# EAGLE board 13371_9DoF_Sensor_Stick_panel_v21 (EAGLE 7.5.0), part 1 of 9
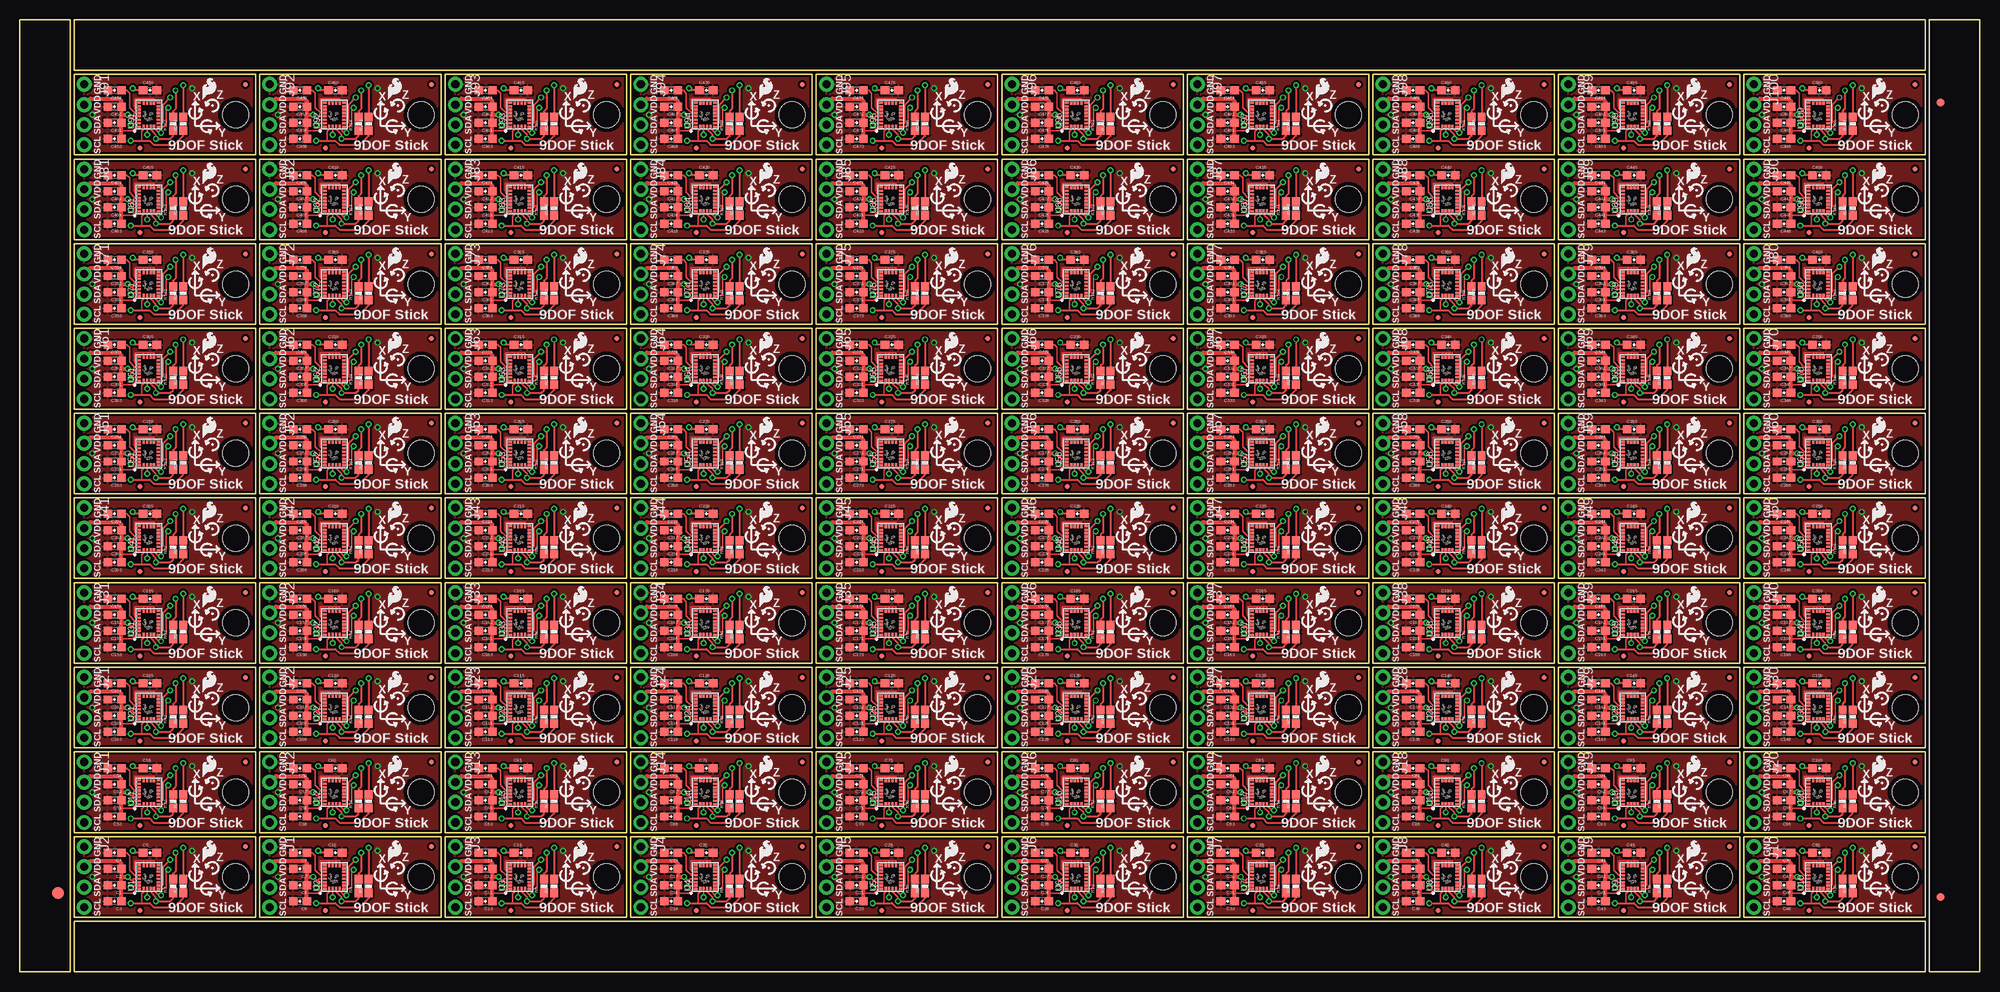
[diagram p0: board, top side]
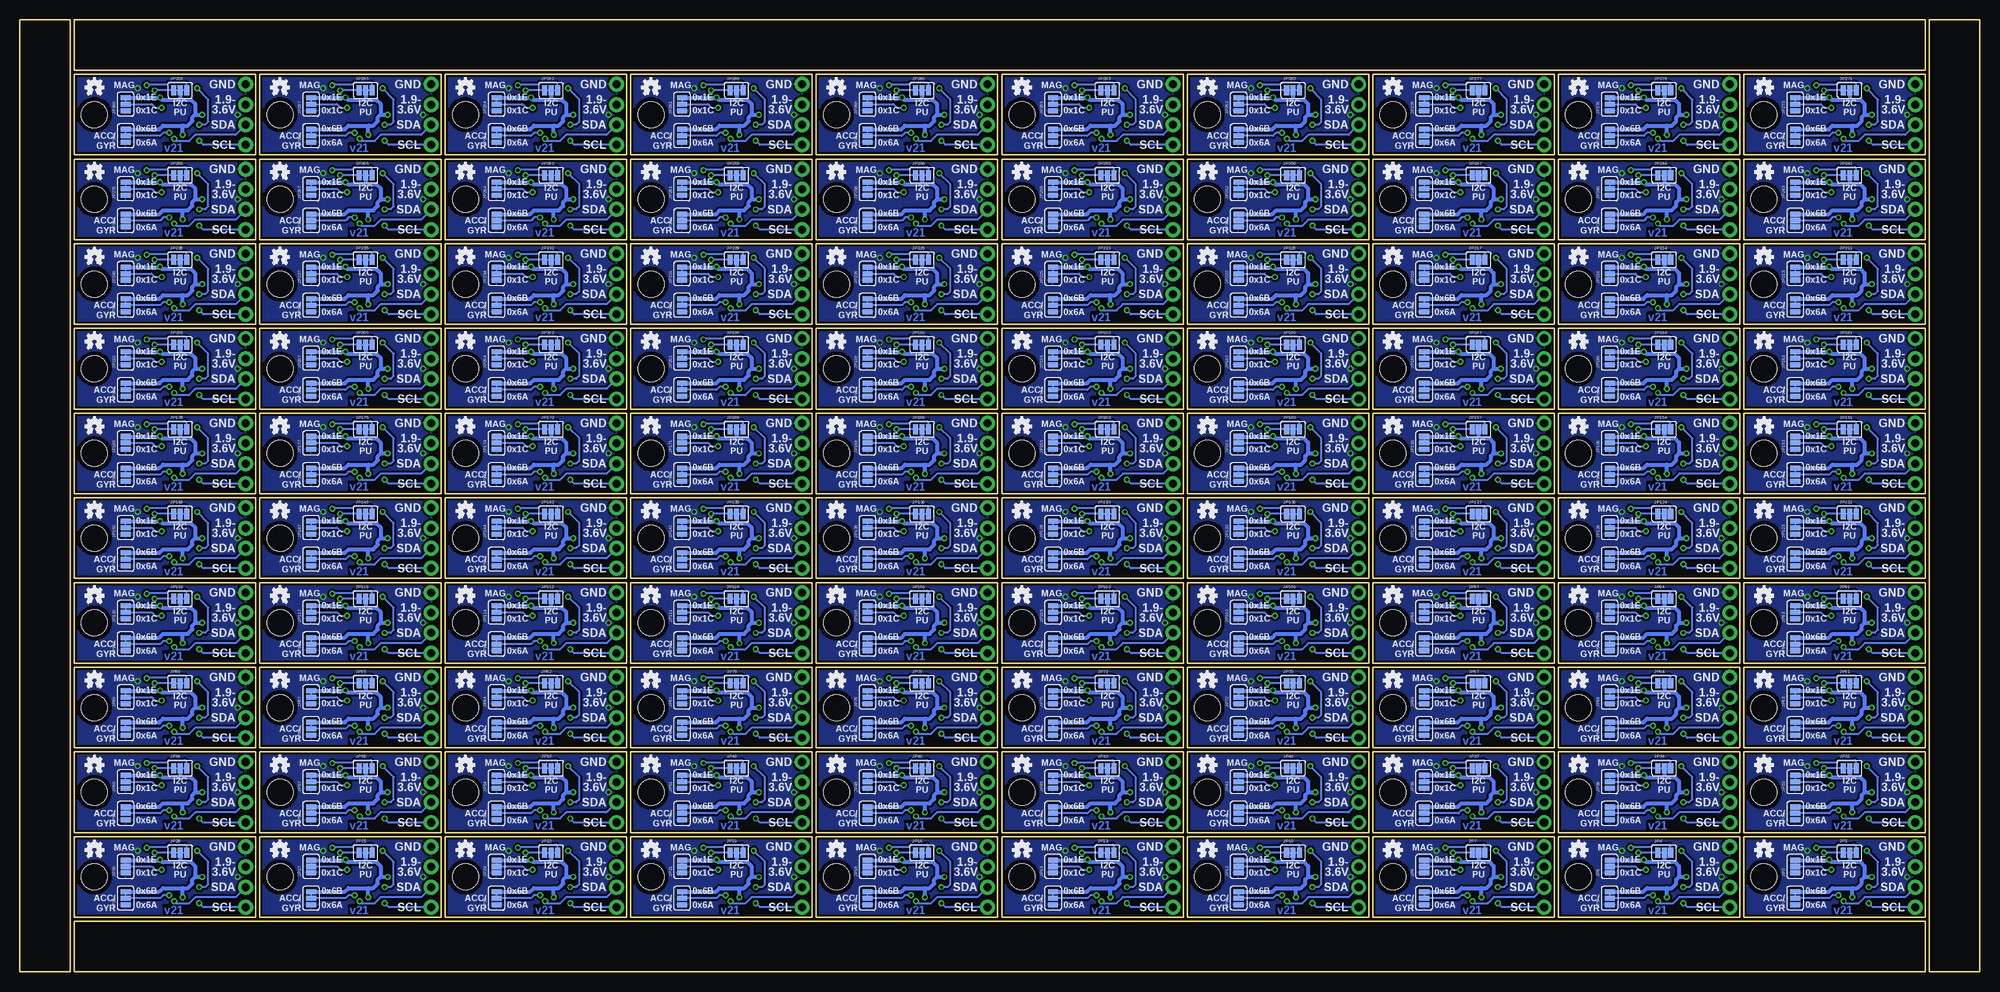
[diagram p1: board, bottom side, seen from below]

Size 246.89 x 119.89 mm. Coordinates in mm from the lower left corner, seen from the top.
Outline: 424 segments
Copper layers (1*16): Top 0.035mm / dielectric 1.5mm / Bottom 0.035mm
Design rules "SparkFun-2-layer-TIGHT": minimum track width 7mil, minimum drill 15mil, track to track 7mil, track to pad 7mil, pad to pad 7mil, via to via 7mil, smd to smd 7mil, copper to edge 7mil, drill to drill 7mil, minimum pad ring 7mil, minimum via ring 7mil, stop-mask expansion 4mil, vias tented up to drill 25mil, thermal gap 10mil

## Footprints (pad centres in the part's own frame; a part is rotated, then mirrored left to right if it is on the bottom)
0603-CAP = smd 1.1 x 1: 1 -0.85,0; 2 0.85,0
FIDUCIAL-1.5X3 = smd 1.5 x 1.5: 1 0,0
FIDUCIAL-1X2 = smd 1 x 1: 1 0,0
MICRO-FIDUCIAL = smd 0.635 x 0.635: 1 0,0
STAND-OFF = hole 3.302: 0,0
1X04_NO_SILK_ALL_ROUND = drill 1.016 pad 1.88: 1 0,0; 2 2.54,0; 3 5.08,0; 4 7.62,0
PAD-JUMPER-3-3OF3_NC_BY_TRACE_YES_SILK_FULL_BOX = smd 0.635 x 1.27: 1 -0.813,0; 2 0,0; 3 0.813,0
PAD-JUMPER-3-2OF3_NC_BY_TRACE_YES_SILK_FULL_BOX = smd 0.635 x 1.27: 1 -0.813,0; 2 0,0; 3 0.813,0
0603-RES = smd 1.1 x 1: 1 -0.85,0; 2 0.85,0
LGA24-8X4 = smd 0.27 x 0.45: 1 -1.505,1.225; 6 -1.505,-1.225; 7 -1.075,-1.225; 8 -0.645,-1.225; 9 -0.215,-1.225; 10 0.215,-1.225; 11 0.645,-1.225; 12 1.075,-1.225; 13 1.505,-1.225; 18 1.505,1.225; 19 1.075,1.225; 20 0.645,1.225; 21 0.215,1.225; 22 -0.215,1.225; 23 -0.645,1.225; 24 -1.075,1.225 | smd 0.45 x 0.27: 2 -1.475,0.645; 3 -1.475,0.215; 4 -1.475,-0.215; 5 -1.475,-0.645; 14 1.475,-0.645; 15 1.475,-0.215; 16 1.475,0.215; 17 1.475,0.645

## Placement (x,y rotation side)
C1  10uF  [0603-CAP]  11.94,10.92 180 top
C2  0.1uF  [0603-CAP]  11.94,12.95 180 top
C3  0.1uF  [0603-CAP]  11.94,8.89 180 top
C4  10nF  [0603-CAP]  11.94,14.99 180 top
C5  0.1uF  [0603-CAP]  16.38,14.99 0 top
C6  10uF  [0603-CAP]  35.31,10.92 180 top
C7  0.1uF  [0603-CAP]  35.31,12.95 180 top
C8  0.1uF  [0603-CAP]  35.31,8.89 180 top
C9  10nF  [0603-CAP]  35.31,14.99 180 top
C10  0.1uF  [0603-CAP]  39.75,14.99 0 top
C11  10uF  [0603-CAP]  58.67,10.92 180 top
C12  0.1uF  [0603-CAP]  58.67,12.95 180 top
C13  0.1uF  [0603-CAP]  58.67,8.89 180 top
C14  10nF  [0603-CAP]  58.67,14.99 180 top
C15  0.1uF  [0603-CAP]  63.12,14.99 0 top
C16  10uF  [0603-CAP]  82.04,10.92 180 top
C17  0.1uF  [0603-CAP]  82.04,12.95 180 top
C18  0.1uF  [0603-CAP]  82.04,8.89 180 top
C19  10nF  [0603-CAP]  82.04,14.99 180 top
C20  0.1uF  [0603-CAP]  86.49,14.99 0 top
C21  10uF  [0603-CAP]  105.41,10.92 180 top
C22  0.1uF  [0603-CAP]  105.41,12.95 180 top
C23  0.1uF  [0603-CAP]  105.41,8.89 180 top
C24  10nF  [0603-CAP]  105.41,14.99 180 top
C25  0.1uF  [0603-CAP]  109.86,14.99 0 top
C26  10uF  [0603-CAP]  128.78,10.92 180 top
C27  0.1uF  [0603-CAP]  128.78,12.95 180 top
C28  0.1uF  [0603-CAP]  128.78,8.89 180 top
C29  10nF  [0603-CAP]  128.78,14.99 180 top
C30  0.1uF  [0603-CAP]  133.22,14.99 0 top
C31  10uF  [0603-CAP]  152.15,10.92 180 top
C32  0.1uF  [0603-CAP]  152.15,12.95 180 top
C33  0.1uF  [0603-CAP]  152.15,8.89 180 top
C34  10nF  [0603-CAP]  152.15,14.99 180 top
C35  0.1uF  [0603-CAP]  156.59,14.99 0 top
C36  10uF  [0603-CAP]  175.51,10.92 180 top
C37  0.1uF  [0603-CAP]  175.51,12.95 180 top
C38  0.1uF  [0603-CAP]  175.51,8.89 180 top
C39  10nF  [0603-CAP]  175.51,14.99 180 top
C40  0.1uF  [0603-CAP]  179.96,14.99 0 top
C41  10uF  [0603-CAP]  198.88,10.92 180 top
C42  0.1uF  [0603-CAP]  198.88,12.95 180 top
C43  0.1uF  [0603-CAP]  198.88,8.89 180 top
C44  10nF  [0603-CAP]  198.88,14.99 180 top
C45  0.1uF  [0603-CAP]  203.33,14.99 0 top
C46  10uF  [0603-CAP]  222.25,10.92 180 top
C47  0.1uF  [0603-CAP]  222.25,12.95 180 top
C48  0.1uF  [0603-CAP]  222.25,8.89 180 top
C49  10nF  [0603-CAP]  222.25,14.99 180 top
C50  0.1uF  [0603-CAP]  226.69,14.99 0 top
C51  10uF  [0603-CAP]  11.94,21.59 180 top
C52  0.1uF  [0603-CAP]  11.94,23.62 180 top
C53  0.1uF  [0603-CAP]  11.94,19.56 180 top
C54  10nF  [0603-CAP]  11.94,25.65 180 top
C55  0.1uF  [0603-CAP]  16.38,25.65 0 top
C56  10uF  [0603-CAP]  35.31,21.59 180 top
C57  0.1uF  [0603-CAP]  35.31,23.62 180 top
C58  0.1uF  [0603-CAP]  35.31,19.56 180 top
C59  10nF  [0603-CAP]  35.31,25.65 180 top
C60  0.1uF  [0603-CAP]  39.75,25.65 0 top
C61  10uF  [0603-CAP]  58.67,21.59 180 top
C62  0.1uF  [0603-CAP]  58.67,23.62 180 top
C63  0.1uF  [0603-CAP]  58.67,19.56 180 top
C64  10nF  [0603-CAP]  58.67,25.65 180 top
C65  0.1uF  [0603-CAP]  63.12,25.65 0 top
C66  10uF  [0603-CAP]  82.04,21.59 180 top
C67  0.1uF  [0603-CAP]  82.04,23.62 180 top
C68  0.1uF  [0603-CAP]  82.04,19.56 180 top
C69  10nF  [0603-CAP]  82.04,25.65 180 top
C70  0.1uF  [0603-CAP]  86.49,25.65 0 top
C71  10uF  [0603-CAP]  105.41,21.59 180 top
C72  0.1uF  [0603-CAP]  105.41,23.62 180 top
C73  0.1uF  [0603-CAP]  105.41,19.56 180 top
C74  10nF  [0603-CAP]  105.41,25.65 180 top
C75  0.1uF  [0603-CAP]  109.86,25.65 0 top
C76  10uF  [0603-CAP]  128.78,21.59 180 top
C77  0.1uF  [0603-CAP]  128.78,23.62 180 top
C78  0.1uF  [0603-CAP]  128.78,19.56 180 top
C79  10nF  [0603-CAP]  128.78,25.65 180 top
C80  0.1uF  [0603-CAP]  133.22,25.65 0 top
C81  10uF  [0603-CAP]  152.15,21.59 180 top
C82  0.1uF  [0603-CAP]  152.15,23.62 180 top
C83  0.1uF  [0603-CAP]  152.15,19.56 180 top
C84  10nF  [0603-CAP]  152.15,25.65 180 top
C85  0.1uF  [0603-CAP]  156.59,25.65 0 top
C86  10uF  [0603-CAP]  175.51,21.59 180 top
C87  0.1uF  [0603-CAP]  175.51,23.62 180 top
C88  0.1uF  [0603-CAP]  175.51,19.56 180 top
C89  10nF  [0603-CAP]  175.51,25.65 180 top
C90  0.1uF  [0603-CAP]  179.96,25.65 0 top
C91  10uF  [0603-CAP]  198.88,21.59 180 top
C92  0.1uF  [0603-CAP]  198.88,23.62 180 top
C93  0.1uF  [0603-CAP]  198.88,19.56 180 top
C94  10nF  [0603-CAP]  198.88,25.65 180 top
C95  0.1uF  [0603-CAP]  203.33,25.65 0 top
C96  10uF  [0603-CAP]  222.25,21.59 180 top
C97  0.1uF  [0603-CAP]  222.25,23.62 180 top
C98  0.1uF  [0603-CAP]  222.25,19.56 180 top
C99  10nF  [0603-CAP]  222.25,25.65 180 top
C100  0.1uF  [0603-CAP]  226.69,25.65 0 top
C101  10uF  [0603-CAP]  11.94,32.26 180 top
C102  0.1uF  [0603-CAP]  11.94,34.29 180 top
C103  0.1uF  [0603-CAP]  11.94,30.23 180 top
C104  10nF  [0603-CAP]  11.94,36.32 180 top
C105  0.1uF  [0603-CAP]  16.38,36.32 0 top
C106  10uF  [0603-CAP]  35.31,32.26 180 top
C107  0.1uF  [0603-CAP]  35.31,34.29 180 top
C108  0.1uF  [0603-CAP]  35.31,30.23 180 top
C109  10nF  [0603-CAP]  35.31,36.32 180 top
C110  0.1uF  [0603-CAP]  39.75,36.32 0 top
C111  10uF  [0603-CAP]  58.67,32.26 180 top
C112  0.1uF  [0603-CAP]  58.67,34.29 180 top
C113  0.1uF  [0603-CAP]  58.67,30.23 180 top
C114  10nF  [0603-CAP]  58.67,36.32 180 top
C115  0.1uF  [0603-CAP]  63.12,36.32 0 top
C116  10uF  [0603-CAP]  82.04,32.26 180 top
C117  0.1uF  [0603-CAP]  82.04,34.29 180 top
C118  0.1uF  [0603-CAP]  82.04,30.23 180 top
C119  10nF  [0603-CAP]  82.04,36.32 180 top
C120  0.1uF  [0603-CAP]  86.49,36.32 0 top
C121  10uF  [0603-CAP]  105.41,32.26 180 top
C122  0.1uF  [0603-CAP]  105.41,34.29 180 top
C123  0.1uF  [0603-CAP]  105.41,30.23 180 top
C124  10nF  [0603-CAP]  105.41,36.32 180 top
C125  0.1uF  [0603-CAP]  109.86,36.32 0 top
C126  10uF  [0603-CAP]  128.78,32.26 180 top
C127  0.1uF  [0603-CAP]  128.78,34.29 180 top
C128  0.1uF  [0603-CAP]  128.78,30.23 180 top
C129  10nF  [0603-CAP]  128.78,36.32 180 top
C130  0.1uF  [0603-CAP]  133.22,36.32 0 top
C131  10uF  [0603-CAP]  152.15,32.26 180 top
C132  0.1uF  [0603-CAP]  152.15,34.29 180 top
C133  0.1uF  [0603-CAP]  152.15,30.23 180 top
C134  10nF  [0603-CAP]  152.15,36.32 180 top
C135  0.1uF  [0603-CAP]  156.59,36.32 0 top
C136  10uF  [0603-CAP]  175.51,32.26 180 top
C137  0.1uF  [0603-CAP]  175.51,34.29 180 top
C138  0.1uF  [0603-CAP]  175.51,30.23 180 top
C139  10nF  [0603-CAP]  175.51,36.32 180 top
C140  0.1uF  [0603-CAP]  179.96,36.32 0 top
C141  10uF  [0603-CAP]  198.88,32.26 180 top
C142  0.1uF  [0603-CAP]  198.88,34.29 180 top
C143  0.1uF  [0603-CAP]  198.88,30.23 180 top
C144  10nF  [0603-CAP]  198.88,36.32 180 top
C145  0.1uF  [0603-CAP]  203.33,36.32 0 top
C146  10uF  [0603-CAP]  222.25,32.26 180 top
C147  0.1uF  [0603-CAP]  222.25,34.29 180 top
C148  0.1uF  [0603-CAP]  222.25,30.23 180 top
C149  10nF  [0603-CAP]  222.25,36.32 180 top
C150  0.1uF  [0603-CAP]  226.69,36.32 0 top
C151  10uF  [0603-CAP]  11.94,42.93 180 top
C152  0.1uF  [0603-CAP]  11.94,44.96 180 top
C153  0.1uF  [0603-CAP]  11.94,40.89 180 top
C154  10nF  [0603-CAP]  11.94,46.99 180 top
C155  0.1uF  [0603-CAP]  16.38,46.99 0 top
C156  10uF  [0603-CAP]  35.31,42.93 180 top
C157  0.1uF  [0603-CAP]  35.31,44.96 180 top
C158  0.1uF  [0603-CAP]  35.31,40.89 180 top
C159  10nF  [0603-CAP]  35.31,46.99 180 top
C160  0.1uF  [0603-CAP]  39.75,46.99 0 top
C161  10uF  [0603-CAP]  58.67,42.93 180 top
C162  0.1uF  [0603-CAP]  58.67,44.96 180 top
C163  0.1uF  [0603-CAP]  58.67,40.89 180 top
C164  10nF  [0603-CAP]  58.67,46.99 180 top
C165  0.1uF  [0603-CAP]  63.12,46.99 0 top
C166  10uF  [0603-CAP]  82.04,42.93 180 top
C167  0.1uF  [0603-CAP]  82.04,44.96 180 top
C168  0.1uF  [0603-CAP]  82.04,40.89 180 top
C169  10nF  [0603-CAP]  82.04,46.99 180 top
C170  0.1uF  [0603-CAP]  86.49,46.99 0 top
C171  10uF  [0603-CAP]  105.41,42.93 180 top
C172  0.1uF  [0603-CAP]  105.41,44.96 180 top
C173  0.1uF  [0603-CAP]  105.41,40.89 180 top
C174  10nF  [0603-CAP]  105.41,46.99 180 top
C175  0.1uF  [0603-CAP]  109.86,46.99 0 top
C176  10uF  [0603-CAP]  128.78,42.93 180 top
C177  0.1uF  [0603-CAP]  128.78,44.96 180 top
C178  0.1uF  [0603-CAP]  128.78,40.89 180 top
C179  10nF  [0603-CAP]  128.78,46.99 180 top
C180  0.1uF  [0603-CAP]  133.22,46.99 0 top
C181  10uF  [0603-CAP]  152.15,42.93 180 top
C182  0.1uF  [0603-CAP]  152.15,44.96 180 top
C183  0.1uF  [0603-CAP]  152.15,40.89 180 top
C184  10nF  [0603-CAP]  152.15,46.99 180 top
C185  0.1uF  [0603-CAP]  156.59,46.99 0 top
C186  10uF  [0603-CAP]  175.51,42.93 180 top
C187  0.1uF  [0603-CAP]  175.51,44.96 180 top
C188  0.1uF  [0603-CAP]  175.51,40.89 180 top
C189  10nF  [0603-CAP]  175.51,46.99 180 top
C190  0.1uF  [0603-CAP]  179.96,46.99 0 top
C191  10uF  [0603-CAP]  198.88,42.93 180 top
C192  0.1uF  [0603-CAP]  198.88,44.96 180 top
C193  0.1uF  [0603-CAP]  198.88,40.89 180 top
C194  10nF  [0603-CAP]  198.88,46.99 180 top
C195  0.1uF  [0603-CAP]  203.33,46.99 0 top
C196  10uF  [0603-CAP]  222.25,42.93 180 top
C197  0.1uF  [0603-CAP]  222.25,44.96 180 top
C198  0.1uF  [0603-CAP]  222.25,40.89 180 top
C199  10nF  [0603-CAP]  222.25,46.99 180 top
C200  0.1uF  [0603-CAP]  226.69,46.99 0 top
C201  10uF  [0603-CAP]  11.94,53.59 180 top
C202  0.1uF  [0603-CAP]  11.94,55.63 180 top
C203  0.1uF  [0603-CAP]  11.94,51.56 180 top
C204  10nF  [0603-CAP]  11.94,57.66 180 top
C205  0.1uF  [0603-CAP]  16.38,57.66 0 top
C206  10uF  [0603-CAP]  35.31,53.59 180 top
C207  0.1uF  [0603-CAP]  35.31,55.63 180 top
C208  0.1uF  [0603-CAP]  35.31,51.56 180 top
C209  10nF  [0603-CAP]  35.31,57.66 180 top
C210  0.1uF  [0603-CAP]  39.75,57.66 0 top
C211  10uF  [0603-CAP]  58.67,53.59 180 top
C212  0.1uF  [0603-CAP]  58.67,55.63 180 top
C213  0.1uF  [0603-CAP]  58.67,51.56 180 top
C214  10nF  [0603-CAP]  58.67,57.66 180 top
C215  0.1uF  [0603-CAP]  63.12,57.66 0 top
C216  10uF  [0603-CAP]  82.04,53.59 180 top
C217  0.1uF  [0603-CAP]  82.04,55.63 180 top
C218  0.1uF  [0603-CAP]  82.04,51.56 180 top
C219  10nF  [0603-CAP]  82.04,57.66 180 top
C220  0.1uF  [0603-CAP]  86.49,57.66 0 top
C221  10uF  [0603-CAP]  105.41,53.59 180 top
C222  0.1uF  [0603-CAP]  105.41,55.63 180 top
C223  0.1uF  [0603-CAP]  105.41,51.56 180 top
C224  10nF  [0603-CAP]  105.41,57.66 180 top
C225  0.1uF  [0603-CAP]  109.86,57.66 0 top
C226  10uF  [0603-CAP]  128.78,53.59 180 top
C227  0.1uF  [0603-CAP]  128.78,55.63 180 top
C228  0.1uF  [0603-CAP]  128.78,51.56 180 top
C229  10nF  [0603-CAP]  128.78,57.66 180 top
C230  0.1uF  [0603-CAP]  133.22,57.66 0 top
C231  10uF  [0603-CAP]  152.15,53.59 180 top
C232  0.1uF  [0603-CAP]  152.15,55.63 180 top
C233  0.1uF  [0603-CAP]  152.15,51.56 180 top
C234  10nF  [0603-CAP]  152.15,57.66 180 top
C235  0.1uF  [0603-CAP]  156.59,57.66 0 top
C236  10uF  [0603-CAP]  175.51,53.59 180 top
C237  0.1uF  [0603-CAP]  175.51,55.63 180 top
C238  0.1uF  [0603-CAP]  175.51,51.56 180 top
C239  10nF  [0603-CAP]  175.51,57.66 180 top
C240  0.1uF  [0603-CAP]  179.96,57.66 0 top
C241  10uF  [0603-CAP]  198.88,53.59 180 top
C242  0.1uF  [0603-CAP]  198.88,55.63 180 top
C243  0.1uF  [0603-CAP]  198.88,51.56 180 top
C244  10nF  [0603-CAP]  198.88,57.66 180 top
C245  0.1uF  [0603-CAP]  203.33,57.66 0 top
C246  10uF  [0603-CAP]  222.25,53.59 180 top
C247  0.1uF  [0603-CAP]  222.25,55.63 180 top
C248  0.1uF  [0603-CAP]  222.25,51.56 180 top
C249  10nF  [0603-CAP]  222.25,57.66 180 top
C250  0.1uF  [0603-CAP]  226.69,57.66 0 top
C251  10uF  [0603-CAP]  11.94,64.26 180 top
C252  0.1uF  [0603-CAP]  11.94,66.29 180 top
C253  0.1uF  [0603-CAP]  11.94,62.23 180 top
C254  10nF  [0603-CAP]  11.94,68.33 180 top
C255  0.1uF  [0603-CAP]  16.38,68.33 0 top
C256  10uF  [0603-CAP]  35.31,64.26 180 top
C257  0.1uF  [0603-CAP]  35.31,66.29 180 top
C258  0.1uF  [0603-CAP]  35.31,62.23 180 top
C259  10nF  [0603-CAP]  35.31,68.33 180 top
C260  0.1uF  [0603-CAP]  39.75,68.33 0 top
C261  10uF  [0603-CAP]  58.67,64.26 180 top
C262  0.1uF  [0603-CAP]  58.67,66.29 180 top
C263  0.1uF  [0603-CAP]  58.67,62.23 180 top
C264  10nF  [0603-CAP]  58.67,68.33 180 top
C265  0.1uF  [0603-CAP]  63.12,68.33 0 top
C266  10uF  [0603-CAP]  82.04,64.26 180 top
C267  0.1uF  [0603-CAP]  82.04,66.29 180 top
C268  0.1uF  [0603-CAP]  82.04,62.23 180 top
C269  10nF  [0603-CAP]  82.04,68.33 180 top
C270  0.1uF  [0603-CAP]  86.49,68.33 0 top
C271  10uF  [0603-CAP]  105.41,64.26 180 top
C272  0.1uF  [0603-CAP]  105.41,66.29 180 top
C273  0.1uF  [0603-CAP]  105.41,62.23 180 top
C274  10nF  [0603-CAP]  105.41,68.33 180 top
C275  0.1uF  [0603-CAP]  109.86,68.33 0 top
C276  10uF  [0603-CAP]  128.78,64.26 180 top
C277  0.1uF  [0603-CAP]  128.78,66.29 180 top
C278  0.1uF  [0603-CAP]  128.78,62.23 180 top
C279  10nF  [0603-CAP]  128.78,68.33 180 top
C280  0.1uF  [0603-CAP]  133.22,68.33 0 top
C281  10uF  [0603-CAP]  152.15,64.26 180 top
C282  0.1uF  [0603-CAP]  152.15,66.29 180 top
C283  0.1uF  [0603-CAP]  152.15,62.23 180 top
C284  10nF  [0603-CAP]  152.15,68.33 180 top
C285  0.1uF  [0603-CAP]  156.59,68.33 0 top
C286  10uF  [0603-CAP]  175.51,64.26 180 top
C287  0.1uF  [0603-CAP]  175.51,66.29 180 top
C288  0.1uF  [0603-CAP]  175.51,62.23 180 top
C289  10nF  [0603-CAP]  175.51,68.33 180 top
C290  0.1uF  [0603-CAP]  179.96,68.33 0 top
C291  10uF  [0603-CAP]  198.88,64.26 180 top
C292  0.1uF  [0603-CAP]  198.88,66.29 180 top
C293  0.1uF  [0603-CAP]  198.88,62.23 180 top
C294  10nF  [0603-CAP]  198.88,68.33 180 top
C295  0.1uF  [0603-CAP]  203.33,68.33 0 top
C296  10uF  [0603-CAP]  222.25,64.26 180 top
C297  0.1uF  [0603-CAP]  222.25,66.29 180 top
C298  0.1uF  [0603-CAP]  222.25,62.23 180 top
C299  10nF  [0603-CAP]  222.25,68.33 180 top
C300  0.1uF  [0603-CAP]  226.69,68.33 0 top
C301  10uF  [0603-CAP]  11.94,74.93 180 top
C302  0.1uF  [0603-CAP]  11.94,76.96 180 top
C303  0.1uF  [0603-CAP]  11.94,72.9 180 top
C304  10nF  [0603-CAP]  11.94,78.99 180 top
C305  0.1uF  [0603-CAP]  16.38,78.99 0 top
C306  10uF  [0603-CAP]  35.31,74.93 180 top
C307  0.1uF  [0603-CAP]  35.31,76.96 180 top
C308  0.1uF  [0603-CAP]  35.31,72.9 180 top
C309  10nF  [0603-CAP]  35.31,78.99 180 top
C310  0.1uF  [0603-CAP]  39.75,78.99 0 top
C311  10uF  [0603-CAP]  58.67,74.93 180 top
C312  0.1uF  [0603-CAP]  58.67,76.96 180 top
C313  0.1uF  [0603-CAP]  58.67,72.9 180 top
C314  10nF  [0603-CAP]  58.67,78.99 180 top
C315  0.1uF  [0603-CAP]  63.12,78.99 0 top
C316  10uF  [0603-CAP]  82.04,74.93 180 top
C317  0.1uF  [0603-CAP]  82.04,76.96 180 top
C318  0.1uF  [0603-CAP]  82.04,72.9 180 top
C319  10nF  [0603-CAP]  82.04,78.99 180 top
C320  0.1uF  [0603-CAP]  86.49,78.99 0 top
C321  10uF  [0603-CAP]  105.41,74.93 180 top
C322  0.1uF  [0603-CAP]  105.41,76.96 180 top
C323  0.1uF  [0603-CAP]  105.41,72.9 180 top
C324  10nF  [0603-CAP]  105.41,78.99 180 top
C325  0.1uF  [0603-CAP]  109.86,78.99 0 top
C326  10uF  [0603-CAP]  128.78,74.93 180 top
C327  0.1uF  [0603-CAP]  128.78,76.96 180 top
C328  0.1uF  [0603-CAP]  128.78,72.9 180 top
C329  10nF  [0603-CAP]  128.78,78.99 180 top
C330  0.1uF  [0603-CAP]  133.22,78.99 0 top
C331  10uF  [0603-CAP]  152.15,74.93 180 top
C332  0.1uF  [0603-CAP]  152.15,76.96 180 top
C333  0.1uF  [0603-CAP]  152.15,72.9 180 top
C334  10nF  [0603-CAP]  152.15,78.99 180 top
C335  0.1uF  [0603-CAP]  156.59,78.99 0 top
C336  10uF  [0603-CAP]  175.51,74.93 180 top
C337  0.1uF  [0603-CAP]  175.51,76.96 180 top
C338  0.1uF  [0603-CAP]  175.51,72.9 180 top
C339  10nF  [0603-CAP]  175.51,78.99 180 top
C340  0.1uF  [0603-CAP]  179.96,78.99 0 top
C341  10uF  [0603-CAP]  198.88,74.93 180 top
C342  0.1uF  [0603-CAP]  198.88,76.96 180 top
C343  0.1uF  [0603-CAP]  198.88,72.9 180 top
C344  10nF  [0603-CAP]  198.88,78.99 180 top
C345  0.1uF  [0603-CAP]  203.33,78.99 0 top
C346  10uF  [0603-CAP]  222.25,74.93 180 top
C347  0.1uF  [0603-CAP]  222.25,76.96 180 top
C348  0.1uF  [0603-CAP]  222.25,72.9 180 top
C349  10nF  [0603-CAP]  222.25,78.99 180 top
C350  0.1uF  [0603-CAP]  226.69,78.99 0 top
C351  10uF  [0603-CAP]  11.94,85.6 180 top
C352  0.1uF  [0603-CAP]  11.94,87.63 180 top
C353  0.1uF  [0603-CAP]  11.94,83.57 180 top
C354  10nF  [0603-CAP]  11.94,89.66 180 top
C355  0.1uF  [0603-CAP]  16.38,89.66 0 top
C356  10uF  [0603-CAP]  35.31,85.6 180 top
C357  0.1uF  [0603-CAP]  35.31,87.63 180 top
C358  0.1uF  [0603-CAP]  35.31,83.57 180 top
C359  10nF  [0603-CAP]  35.31,89.66 180 top
C360  0.1uF  [0603-CAP]  39.75,89.66 0 top
C361  10uF  [0603-CAP]  58.67,85.6 180 top
C362  0.1uF  [0603-CAP]  58.67,87.63 180 top
C363  0.1uF  [0603-CAP]  58.67,83.57 180 top
C364  10nF  [0603-CAP]  58.67,89.66 180 top
C365  0.1uF  [0603-CAP]  63.12,89.66 0 top
C366  10uF  [0603-CAP]  82.04,85.6 180 top
C367  0.1uF  [0603-CAP]  82.04,87.63 180 top
C368  0.1uF  [0603-CAP]  82.04,83.57 180 top
C369  10nF  [0603-CAP]  82.04,89.66 180 top
C370  0.1uF  [0603-CAP]  86.49,89.66 0 top
C371  10uF  [0603-CAP]  105.41,85.6 180 top
C372  0.1uF  [0603-CAP]  105.41,87.63 180 top
C373  0.1uF  [0603-CAP]  105.41,83.57 180 top
C374  10nF  [0603-CAP]  105.41,89.66 180 top
C375  0.1uF  [0603-CAP]  109.86,89.66 0 top
C376  10uF  [0603-CAP]  128.78,85.6 180 top
C377  0.1uF  [0603-CAP]  128.78,87.63 180 top
C378  0.1uF  [0603-CAP]  128.78,83.57 180 top
C379  10nF  [0603-CAP]  128.78,89.66 180 top
C380  0.1uF  [0603-CAP]  133.22,89.66 0 top
C381  10uF  [0603-CAP]  152.15,85.6 180 top
C382  0.1uF  [0603-CAP]  152.15,87.63 180 top
C383  0.1uF  [0603-CAP]  152.15,83.57 180 top
C384  10nF  [0603-CAP]  152.15,89.66 180 top
C385  0.1uF  [0603-CAP]  156.59,89.66 0 top
C386  10uF  [0603-CAP]  175.51,85.6 180 top
C387  0.1uF  [0603-CAP]  175.51,87.63 180 top
C388  0.1uF  [0603-CAP]  175.51,83.57 180 top
C389  10nF  [0603-CAP]  175.51,89.66 180 top
C390  0.1uF  [0603-CAP]  179.96,89.66 0 top
C391  10uF  [0603-CAP]  198.88,85.6 180 top
C392  0.1uF  [0603-CAP]  198.88,87.63 180 top
C393  0.1uF  [0603-CAP]  198.88,83.57 180 top
C394  10nF  [0603-CAP]  198.88,89.66 180 top
C395  0.1uF  [0603-CAP]  203.33,89.66 0 top
C396  10uF  [0603-CAP]  222.25,85.6 180 top
C397  0.1uF  [0603-CAP]  222.25,87.63 180 top
C398  0.1uF  [0603-CAP]  222.25,83.57 180 top
C399  10nF  [0603-CAP]  222.25,89.66 180 top
C400  0.1uF  [0603-CAP]  226.69,89.66 0 top
C401  10uF  [0603-CAP]  11.94,96.27 180 top
C402  0.1uF  [0603-CAP]  11.94,98.3 180 top
C403  0.1uF  [0603-CAP]  11.94,94.23 180 top
C404  10nF  [0603-CAP]  11.94,100.33 180 top
C405  0.1uF  [0603-CAP]  16.38,100.33 0 top
C406  10uF  [0603-CAP]  35.31,96.27 180 top
C407  0.1uF  [0603-CAP]  35.31,98.3 180 top
C408  0.1uF  [0603-CAP]  35.31,94.23 180 top
C409  10nF  [0603-CAP]  35.31,100.33 180 top
C410  0.1uF  [0603-CAP]  39.75,100.33 0 top
C411  10uF  [0603-CAP]  58.67,96.27 180 top
C412  0.1uF  [0603-CAP]  58.67,98.3 180 top
C413  0.1uF  [0603-CAP]  58.67,94.23 180 top
C414  10nF  [0603-CAP]  58.67,100.33 180 top
C415  0.1uF  [0603-CAP]  63.12,100.33 0 top
C416  10uF  [0603-CAP]  82.04,96.27 180 top
C417  0.1uF  [0603-CAP]  82.04,98.3 180 top
C418  0.1uF  [0603-CAP]  82.04,94.23 180 top
C419  10nF  [0603-CAP]  82.04,100.33 180 top
C420  0.1uF  [0603-CAP]  86.49,100.33 0 top
C421  10uF  [0603-CAP]  105.41,96.27 180 top
C422  0.1uF  [0603-CAP]  105.41,98.3 180 top
C423  0.1uF  [0603-CAP]  105.41,94.23 180 top
C424  10nF  [0603-CAP]  105.41,100.33 180 top
C425  0.1uF  [0603-CAP]  109.86,100.33 0 top
C426  10uF  [0603-CAP]  128.78,96.27 180 top
C427  0.1uF  [0603-CAP]  128.78,98.3 180 top
C428  0.1uF  [0603-CAP]  128.78,94.23 180 top
C429  10nF  [0603-CAP]  128.78,100.33 180 top
C430  0.1uF  [0603-CAP]  133.22,100.33 0 top
C431  10uF  [0603-CAP]  152.15,96.27 180 top
C432  0.1uF  [0603-CAP]  152.15,98.3 180 top
C433  0.1uF  [0603-CAP]  152.15,94.23 180 top
C434  10nF  [0603-CAP]  152.15,100.33 180 top
C435  0.1uF  [0603-CAP]  156.59,100.33 0 top
C436  10uF  [0603-CAP]  175.51,96.27 180 top
C437  0.1uF  [0603-CAP]  175.51,98.3 180 top
C438  0.1uF  [0603-CAP]  175.51,94.23 180 top
C439  10nF  [0603-CAP]  175.51,100.33 180 top
C440  0.1uF  [0603-CAP]  179.96,100.33 0 top
C441  10uF  [0603-CAP]  198.88,96.27 180 top
C442  0.1uF  [0603-CAP]  198.88,98.3 180 top
C443  0.1uF  [0603-CAP]  198.88,94.23 180 top
C444  10nF  [0603-CAP]  198.88,100.33 180 top
C445  0.1uF  [0603-CAP]  203.33,100.33 0 top
C446  10uF  [0603-CAP]  222.25,96.27 180 top
C447  0.1uF  [0603-CAP]  222.25,98.3 180 top
C448  0.1uF  [0603-CAP]  222.25,94.23 180 top
C449  10nF  [0603-CAP]  222.25,100.33 180 top
C450  0.1uF  [0603-CAP]  226.69,100.33 0 top
C451  10uF  [0603-CAP]  11.94,106.93 180 top
C452  0.1uF  [0603-CAP]  11.94,108.97 180 top
C453  0.1uF  [0603-CAP]  11.94,104.9 180 top
C454  10nF  [0603-CAP]  11.94,111 180 top
C455  0.1uF  [0603-CAP]  16.38,111 0 top
C456  10uF  [0603-CAP]  35.31,106.93 180 top
C457  0.1uF  [0603-CAP]  35.31,108.97 180 top
C458  0.1uF  [0603-CAP]  35.31,104.9 180 top
C459  10nF  [0603-CAP]  35.31,111 180 top
C460  0.1uF  [0603-CAP]  39.75,111 0 top
C461  10uF  [0603-CAP]  58.67,106.93 180 top
C462  0.1uF  [0603-CAP]  58.67,108.97 180 top
C463  0.1uF  [0603-CAP]  58.67,104.9 180 top
C464  10nF  [0603-CAP]  58.67,111 180 top
C465  0.1uF  [0603-CAP]  63.12,111 0 top
C466  10uF  [0603-CAP]  82.04,106.93 180 top
C467  0.1uF  [0603-CAP]  82.04,108.97 180 top
C468  0.1uF  [0603-CAP]  82.04,104.9 180 top
C469  10nF  [0603-CAP]  82.04,111 180 top
C470  0.1uF  [0603-CAP]  86.49,111 0 top
C471  10uF  [0603-CAP]  105.41,106.93 180 top
C472  0.1uF  [0603-CAP]  105.41,108.97 180 top
C473  0.1uF  [0603-CAP]  105.41,104.9 180 top
C474  10nF  [0603-CAP]  105.41,111 180 top
C475  0.1uF  [0603-CAP]  109.86,111 0 top
C476  10uF  [0603-CAP]  128.78,106.93 180 top
C477  0.1uF  [0603-CAP]  128.78,108.97 180 top
C478  0.1uF  [0603-CAP]  128.78,104.9 180 top
C479  10nF  [0603-CAP]  128.78,111 180 top
C480  0.1uF  [0603-CAP]  133.22,111 0 top
C481  10uF  [0603-CAP]  152.15,106.93 180 top
C482  0.1uF  [0603-CAP]  152.15,108.97 180 top
C483  0.1uF  [0603-CAP]  152.15,104.9 180 top
C484  10nF  [0603-CAP]  152.15,111 180 top
C485  0.1uF  [0603-CAP]  156.59,111 0 top
C486  10uF  [0603-CAP]  175.51,106.93 180 top
C487  0.1uF  [0603-CAP]  175.51,108.97 180 top
C488  0.1uF  [0603-CAP]  175.51,104.9 180 top
C489  10nF  [0603-CAP]  175.51,111 180 top
C490  0.1uF  [0603-CAP]  179.96,111 0 top
C491  10uF  [0603-CAP]  198.88,106.93 180 top
C492  0.1uF  [0603-CAP]  198.88,108.97 180 top
C493  0.1uF  [0603-CAP]  198.88,104.9 180 top
C494  10nF  [0603-CAP]  198.88,111 180 top
C495  0.1uF  [0603-CAP]  203.33,111 0 top
C496  10uF  [0603-CAP]  222.25,106.93 180 top
C497  0.1uF  [0603-CAP]  222.25,108.97 180 top
C498  0.1uF  [0603-CAP]  222.25,104.9 180 top
C499  10nF  [0603-CAP]  222.25,111 180 top
C500  0.1uF  [0603-CAP]  226.69,111 0 top
E$1  [FIDUCIAL-1.5X3]  4.83,9.91 0 top
E$7  [FIDUCIAL-1X2]  241.94,9.4 0 top
E$8  [FIDUCIAL-1X2]  241.94,109.47 180 top
FD1  FIDUCIALUFIDUCIAL  [MICRO-FIDUCIAL]  38.48,7.75 0 top
FD2  FIDUCIALUFIDUCIAL  [MICRO-FIDUCIAL]  51.82,15.75 0 top
FD3  FIDUCIALUFIDUCIAL  [MICRO-FIDUCIAL]  15.11,7.75 0 top
FD4  FIDUCIALUFIDUCIAL  [MICRO-FIDUCIAL]  28.45,15.75 0 top
FD5  FIDUCIALUFIDUCIAL  [MICRO-FIDUCIAL]  61.85,7.75 0 top
FD6  FIDUCIALUFIDUCIAL  [MICRO-FIDUCIAL]  75.18,15.75 0 top
FD7  FIDUCIALUFIDUCIAL  [MICRO-FIDUCIAL]  85.22,7.75 0 top
FD8  FIDUCIALUFIDUCIAL  [MICRO-FIDUCIAL]  98.55,15.75 0 top
FD9  FIDUCIALUFIDUCIAL  [MICRO-FIDUCIAL]  108.58,7.75 0 top
FD10  FIDUCIALUFIDUCIAL  [MICRO-FIDUCIAL]  121.92,15.75 0 top
FD11  FIDUCIALUFIDUCIAL  [MICRO-FIDUCIAL]  131.95,7.75 0 top
FD12  FIDUCIALUFIDUCIAL  [MICRO-FIDUCIAL]  145.29,15.75 0 top
FD13  FIDUCIALUFIDUCIAL  [MICRO-FIDUCIAL]  155.32,7.75 0 top
FD14  FIDUCIALUFIDUCIAL  [MICRO-FIDUCIAL]  168.66,15.75 0 top
FD15  FIDUCIALUFIDUCIAL  [MICRO-FIDUCIAL]  178.69,7.75 0 top
FD16  FIDUCIALUFIDUCIAL  [MICRO-FIDUCIAL]  192.02,15.75 0 top
FD17  FIDUCIALUFIDUCIAL  [MICRO-FIDUCIAL]  202.06,7.75 0 top
FD18  FIDUCIALUFIDUCIAL  [MICRO-FIDUCIAL]  215.39,15.75 0 top
FD19  FIDUCIALUFIDUCIAL  [MICRO-FIDUCIAL]  225.43,7.75 0 top
FD20  FIDUCIALUFIDUCIAL  [MICRO-FIDUCIAL]  238.76,15.75 0 top
FD21  FIDUCIALUFIDUCIAL  [MICRO-FIDUCIAL]  15.11,18.41 0 top
FD22  FIDUCIALUFIDUCIAL  [MICRO-FIDUCIAL]  28.45,26.42 0 top
FD23  FIDUCIALUFIDUCIAL  [MICRO-FIDUCIAL]  38.48,18.41 0 top
FD24  FIDUCIALUFIDUCIAL  [MICRO-FIDUCIAL]  51.82,26.42 0 top
FD25  FIDUCIALUFIDUCIAL  [MICRO-FIDUCIAL]  61.85,18.41 0 top
FD26  FIDUCIALUFIDUCIAL  [MICRO-FIDUCIAL]  75.18,26.42 0 top
FD27  FIDUCIALUFIDUCIAL  [MICRO-FIDUCIAL]  85.22,18.41 0 top
FD28  FIDUCIALUFIDUCIAL  [MICRO-FIDUCIAL]  98.55,26.42 0 top
FD29  FIDUCIALUFIDUCIAL  [MICRO-FIDUCIAL]  108.58,18.41 0 top
FD30  FIDUCIALUFIDUCIAL  [MICRO-FIDUCIAL]  121.92,26.42 0 top
FD31  FIDUCIALUFIDUCIAL  [MICRO-FIDUCIAL]  131.95,18.41 0 top
FD32  FIDUCIALUFIDUCIAL  [MICRO-FIDUCIAL]  145.29,26.42 0 top
FD33  FIDUCIALUFIDUCIAL  [MICRO-FIDUCIAL]  155.32,18.41 0 top
FD34  FIDUCIALUFIDUCIAL  [MICRO-FIDUCIAL]  168.66,26.42 0 top
FD35  FIDUCIALUFIDUCIAL  [MICRO-FIDUCIAL]  178.69,18.41 0 top
FD36  FIDUCIALUFIDUCIAL  [MICRO-FIDUCIAL]  192.02,26.42 0 top
FD37  FIDUCIALUFIDUCIAL  [MICRO-FIDUCIAL]  202.06,18.41 0 top
FD38  FIDUCIALUFIDUCIAL  [MICRO-FIDUCIAL]  215.39,26.42 0 top
FD39  FIDUCIALUFIDUCIAL  [MICRO-FIDUCIAL]  225.43,18.41 0 top
FD40  FIDUCIALUFIDUCIAL  [MICRO-FIDUCIAL]  238.76,26.42 0 top
FD41  FIDUCIALUFIDUCIAL  [MICRO-FIDUCIAL]  15.11,29.08 0 top
FD42  FIDUCIALUFIDUCIAL  [MICRO-FIDUCIAL]  28.45,37.08 0 top
FD43  FIDUCIALUFIDUCIAL  [MICRO-FIDUCIAL]  38.48,29.08 0 top
FD44  FIDUCIALUFIDUCIAL  [MICRO-FIDUCIAL]  51.82,37.08 0 top
FD45  FIDUCIALUFIDUCIAL  [MICRO-FIDUCIAL]  61.85,29.08 0 top
FD46  FIDUCIALUFIDUCIAL  [MICRO-FIDUCIAL]  75.18,37.08 0 top
FD47  FIDUCIALUFIDUCIAL  [MICRO-FIDUCIAL]  85.22,29.08 0 top
FD48  FIDUCIALUFIDUCIAL  [MICRO-FIDUCIAL]  98.55,37.08 0 top
FD49  FIDUCIALUFIDUCIAL  [MICRO-FIDUCIAL]  108.58,29.08 0 top
FD50  FIDUCIALUFIDUCIAL  [MICRO-FIDUCIAL]  121.92,37.08 0 top
FD51  FIDUCIALUFIDUCIAL  [MICRO-FIDUCIAL]  131.95,29.08 0 top
FD52  FIDUCIALUFIDUCIAL  [MICRO-FIDUCIAL]  145.29,37.08 0 top
FD53  FIDUCIALUFIDUCIAL  [MICRO-FIDUCIAL]  155.32,29.08 0 top
FD54  FIDUCIALUFIDUCIAL  [MICRO-FIDUCIAL]  168.66,37.08 0 top
FD55  FIDUCIALUFIDUCIAL  [MICRO-FIDUCIAL]  178.69,29.08 0 top
FD56  FIDUCIALUFIDUCIAL  [MICRO-FIDUCIAL]  192.02,37.08 0 top
FD57  FIDUCIALUFIDUCIAL  [MICRO-FIDUCIAL]  202.06,29.08 0 top
FD58  FIDUCIALUFIDUCIAL  [MICRO-FIDUCIAL]  215.39,37.08 0 top
FD59  FIDUCIALUFIDUCIAL  [MICRO-FIDUCIAL]  225.43,29.08 0 top
FD60  FIDUCIALUFIDUCIAL  [MICRO-FIDUCIAL]  238.76,37.08 0 top
FD61  FIDUCIALUFIDUCIAL  [MICRO-FIDUCIAL]  15.11,39.75 0 top
FD62  FIDUCIALUFIDUCIAL  [MICRO-FIDUCIAL]  28.45,47.75 0 top
FD63  FIDUCIALUFIDUCIAL  [MICRO-FIDUCIAL]  38.48,39.75 0 top
FD64  FIDUCIALUFIDUCIAL  [MICRO-FIDUCIAL]  51.82,47.75 0 top
FD65  FIDUCIALUFIDUCIAL  [MICRO-FIDUCIAL]  61.85,39.75 0 top
FD66  FIDUCIALUFIDUCIAL  [MICRO-FIDUCIAL]  75.18,47.75 0 top
FD67  FIDUCIALUFIDUCIAL  [MICRO-FIDUCIAL]  85.22,39.75 0 top
FD68  FIDUCIALUFIDUCIAL  [MICRO-FIDUCIAL]  98.55,47.75 0 top
FD69  FIDUCIALUFIDUCIAL  [MICRO-FIDUCIAL]  108.58,39.75 0 top
FD70  FIDUCIALUFIDUCIAL  [MICRO-FIDUCIAL]  121.92,47.75 0 top
FD71  FIDUCIALUFIDUCIAL  [MICRO-FIDUCIAL]  131.95,39.75 0 top
FD72  FIDUCIALUFIDUCIAL  [MICRO-FIDUCIAL]  145.29,47.75 0 top
FD73  FIDUCIALUFIDUCIAL  [MICRO-FIDUCIAL]  155.32,39.75 0 top
FD74  FIDUCIALUFIDUCIAL  [MICRO-FIDUCIAL]  168.66,47.75 0 top
FD75  FIDUCIALUFIDUCIAL  [MICRO-FIDUCIAL]  178.69,39.75 0 top
FD76  FIDUCIALUFIDUCIAL  [MICRO-FIDUCIAL]  192.02,47.75 0 top
FD77  FIDUCIALUFIDUCIAL  [MICRO-FIDUCIAL]  202.06,39.75 0 top
FD78  FIDUCIALUFIDUCIAL  [MICRO-FIDUCIAL]  215.39,47.75 0 top
FD79  FIDUCIALUFIDUCIAL  [MICRO-FIDUCIAL]  225.43,39.75 0 top
FD80  FIDUCIALUFIDUCIAL  [MICRO-FIDUCIAL]  238.76,47.75 0 top
FD81  FIDUCIALUFIDUCIAL  [MICRO-FIDUCIAL]  15.11,50.42 0 top
FD82  FIDUCIALUFIDUCIAL  [MICRO-FIDUCIAL]  28.45,58.42 0 top
FD83  FIDUCIALUFIDUCIAL  [MICRO-FIDUCIAL]  38.48,50.42 0 top
FD84  FIDUCIALUFIDUCIAL  [MICRO-FIDUCIAL]  51.82,58.42 0 top
FD85  FIDUCIALUFIDUCIAL  [MICRO-FIDUCIAL]  61.85,50.42 0 top
FD86  FIDUCIALUFIDUCIAL  [MICRO-FIDUCIAL]  75.18,58.42 0 top
FD87  FIDUCIALUFIDUCIAL  [MICRO-FIDUCIAL]  85.22,50.42 0 top
FD88  FIDUCIALUFIDUCIAL  [MICRO-FIDUCIAL]  98.55,58.42 0 top
FD89  FIDUCIALUFIDUCIAL  [MICRO-FIDUCIAL]  108.58,50.42 0 top
FD90  FIDUCIALUFIDUCIAL  [MICRO-FIDUCIAL]  121.92,58.42 0 top
FD91  FIDUCIALUFIDUCIAL  [MICRO-FIDUCIAL]  131.95,50.42 0 top
FD92  FIDUCIALUFIDUCIAL  [MICRO-FIDUCIAL]  145.29,58.42 0 top
FD93  FIDUCIALUFIDUCIAL  [MICRO-FIDUCIAL]  155.32,50.42 0 top
FD94  FIDUCIALUFIDUCIAL  [MICRO-FIDUCIAL]  168.66,58.42 0 top
FD95  FIDUCIALUFIDUCIAL  [MICRO-FIDUCIAL]  178.69,50.42 0 top
FD96  FIDUCIALUFIDUCIAL  [MICRO-FIDUCIAL]  192.02,58.42 0 top
FD97  FIDUCIALUFIDUCIAL  [MICRO-FIDUCIAL]  202.06,50.42 0 top
FD98  FIDUCIALUFIDUCIAL  [MICRO-FIDUCIAL]  215.39,58.42 0 top
FD99  FIDUCIALUFIDUCIAL  [MICRO-FIDUCIAL]  225.43,50.42 0 top
FD100  FIDUCIALUFIDUCIAL  [MICRO-FIDUCIAL]  238.76,58.42 0 top
FD101  FIDUCIALUFIDUCIAL  [MICRO-FIDUCIAL]  15.11,61.09 0 top
FD102  FIDUCIALUFIDUCIAL  [MICRO-FIDUCIAL]  28.45,69.09 0 top
FD103  FIDUCIALUFIDUCIAL  [MICRO-FIDUCIAL]  38.48,61.09 0 top
FD104  FIDUCIALUFIDUCIAL  [MICRO-FIDUCIAL]  51.82,69.09 0 top
FD105  FIDUCIALUFIDUCIAL  [MICRO-FIDUCIAL]  61.85,61.09 0 top
FD106  FIDUCIALUFIDUCIAL  [MICRO-FIDUCIAL]  75.18,69.09 0 top
FD107  FIDUCIALUFIDUCIAL  [MICRO-FIDUCIAL]  85.22,61.09 0 top
FD108  FIDUCIALUFIDUCIAL  [MICRO-FIDUCIAL]  98.55,69.09 0 top
FD109  FIDUCIALUFIDUCIAL  [MICRO-FIDUCIAL]  108.58,61.09 0 top
FD110  FIDUCIALUFIDUCIAL  [MICRO-FIDUCIAL]  121.92,69.09 0 top
FD111  FIDUCIALUFIDUCIAL  [MICRO-FIDUCIAL]  131.95,61.09 0 top
FD112  FIDUCIALUFIDUCIAL  [MICRO-FIDUCIAL]  145.29,69.09 0 top
FD113  FIDUCIALUFIDUCIAL  [MICRO-FIDUCIAL]  155.32,61.09 0 top
FD114  FIDUCIALUFIDUCIAL  [MICRO-FIDUCIAL]  168.66,69.09 0 top
FD115  FIDUCIALUFIDUCIAL  [MICRO-FIDUCIAL]  178.69,61.09 0 top
FD116  FIDUCIALUFIDUCIAL  [MICRO-FIDUCIAL]  192.02,69.09 0 top
FD117  FIDUCIALUFIDUCIAL  [MICRO-FIDUCIAL]  202.06,61.09 0 top
FD118  FIDUCIALUFIDUCIAL  [MICRO-FIDUCIAL]  215.39,69.09 0 top
FD119  FIDUCIALUFIDUCIAL  [MICRO-FIDUCIAL]  225.43,61.09 0 top
FD120  FIDUCIALUFIDUCIAL  [MICRO-FIDUCIAL]  238.76,69.09 0 top
FD121  FIDUCIALUFIDUCIAL  [MICRO-FIDUCIAL]  15.11,71.75 0 top
FD122  FIDUCIALUFIDUCIAL  [MICRO-FIDUCIAL]  28.45,79.76 0 top
FD123  FIDUCIALUFIDUCIAL  [MICRO-FIDUCIAL]  38.48,71.75 0 top
FD124  FIDUCIALUFIDUCIAL  [MICRO-FIDUCIAL]  51.82,79.76 0 top
FD125  FIDUCIALUFIDUCIAL  [MICRO-FIDUCIAL]  61.85,71.75 0 top
FD126  FIDUCIALUFIDUCIAL  [MICRO-FIDUCIAL]  75.18,79.76 0 top
FD127  FIDUCIALUFIDUCIAL  [MICRO-FIDUCIAL]  85.22,71.75 0 top
FD128  FIDUCIALUFIDUCIAL  [MICRO-FIDUCIAL]  98.55,79.76 0 top
FD129  FIDUCIALUFIDUCIAL  [MICRO-FIDUCIAL]  108.58,71.75 0 top
FD130  FIDUCIALUFIDUCIAL  [MICRO-FIDUCIAL]  121.92,79.76 0 top
FD131  FIDUCIALUFIDUCIAL  [MICRO-FIDUCIAL]  131.95,71.75 0 top
FD132  FIDUCIALUFIDUCIAL  [MICRO-FIDUCIAL]  145.29,79.76 0 top
FD133  FIDUCIALUFIDUCIAL  [MICRO-FIDUCIAL]  155.32,71.75 0 top
FD134  FIDUCIALUFIDUCIAL  [MICRO-FIDUCIAL]  168.66,79.76 0 top
FD135  FIDUCIALUFIDUCIAL  [MICRO-FIDUCIAL]  178.69,71.75 0 top
FD136  FIDUCIALUFIDUCIAL  [MICRO-FIDUCIAL]  192.02,79.76 0 top
FD137  FIDUCIALUFIDUCIAL  [MICRO-FIDUCIAL]  202.06,71.75 0 top
FD138  FIDUCIALUFIDUCIAL  [MICRO-FIDUCIAL]  215.39,79.76 0 top
FD139  FIDUCIALUFIDUCIAL  [MICRO-FIDUCIAL]  225.43,71.75 0 top
FD140  FIDUCIALUFIDUCIAL  [MICRO-FIDUCIAL]  238.76,79.76 0 top
FD141  FIDUCIALUFIDUCIAL  [MICRO-FIDUCIAL]  15.11,82.42 0 top
FD142  FIDUCIALUFIDUCIAL  [MICRO-FIDUCIAL]  28.45,90.42 0 top
FD143  FIDUCIALUFIDUCIAL  [MICRO-FIDUCIAL]  38.48,82.42 0 top
FD144  FIDUCIALUFIDUCIAL  [MICRO-FIDUCIAL]  51.82,90.42 0 top
FD145  FIDUCIALUFIDUCIAL  [MICRO-FIDUCIAL]  61.85,82.42 0 top
FD146  FIDUCIALUFIDUCIAL  [MICRO-FIDUCIAL]  75.18,90.42 0 top
FD147  FIDUCIALUFIDUCIAL  [MICRO-FIDUCIAL]  85.22,82.42 0 top
FD148  FIDUCIALUFIDUCIAL  [MICRO-FIDUCIAL]  98.55,90.42 0 top
FD149  FIDUCIALUFIDUCIAL  [MICRO-FIDUCIAL]  108.58,82.42 0 top
FD150  FIDUCIALUFIDUCIAL  [MICRO-FIDUCIAL]  121.92,90.42 0 top
FD151  FIDUCIALUFIDUCIAL  [MICRO-FIDUCIAL]  131.95,82.42 0 top
FD152  FIDUCIALUFIDUCIAL  [MICRO-FIDUCIAL]  145.29,90.42 0 top
FD153  FIDUCIALUFIDUCIAL  [MICRO-FIDUCIAL]  155.32,82.42 0 top
FD154  FIDUCIALUFIDUCIAL  [MICRO-FIDUCIAL]  168.66,90.42 0 top
FD155  FIDUCIALUFIDUCIAL  [MICRO-FIDUCIAL]  178.69,82.42 0 top
FD156  FIDUCIALUFIDUCIAL  [MICRO-FIDUCIAL]  192.02,90.42 0 top
FD157  FIDUCIALUFIDUCIAL  [MICRO-FIDUCIAL]  202.06,82.42 0 top
FD158  FIDUCIALUFIDUCIAL  [MICRO-FIDUCIAL]  215.39,90.42 0 top
FD159  FIDUCIALUFIDUCIAL  [MICRO-FIDUCIAL]  225.43,82.42 0 top
FD160  FIDUCIALUFIDUCIAL  [MICRO-FIDUCIAL]  238.76,90.42 0 top
FD161  FIDUCIALUFIDUCIAL  [MICRO-FIDUCIAL]  15.11,93.09 0 top
FD162  FIDUCIALUFIDUCIAL  [MICRO-FIDUCIAL]  28.45,101.09 0 top
FD163  FIDUCIALUFIDUCIAL  [MICRO-FIDUCIAL]  38.48,93.09 0 top
FD164  FIDUCIALUFIDUCIAL  [MICRO-FIDUCIAL]  51.82,101.09 0 top
FD165  FIDUCIALUFIDUCIAL  [MICRO-FIDUCIAL]  61.85,93.09 0 top
FD166  FIDUCIALUFIDUCIAL  [MICRO-FIDUCIAL]  75.18,101.09 0 top
FD167  FIDUCIALUFIDUCIAL  [MICRO-FIDUCIAL]  85.22,93.09 0 top
FD168  FIDUCIALUFIDUCIAL  [MICRO-FIDUCIAL]  98.55,101.09 0 top
FD169  FIDUCIALUFIDUCIAL  [MICRO-FIDUCIAL]  108.58,93.09 0 top
FD170  FIDUCIALUFIDUCIAL  [MICRO-FIDUCIAL]  121.92,101.09 0 top
FD171  FIDUCIALUFIDUCIAL  [MICRO-FIDUCIAL]  131.95,93.09 0 top
FD172  FIDUCIALUFIDUCIAL  [MICRO-FIDUCIAL]  145.29,101.09 0 top
FD173  FIDUCIALUFIDUCIAL  [MICRO-FIDUCIAL]  155.32,93.09 0 top
FD174  FIDUCIALUFIDUCIAL  [MICRO-FIDUCIAL]  168.66,101.09 0 top
FD175  FIDUCIALUFIDUCIAL  [MICRO-FIDUCIAL]  178.69,93.09 0 top
FD176  FIDUCIALUFIDUCIAL  [MICRO-FIDUCIAL]  192.02,101.09 0 top
FD177  FIDUCIALUFIDUCIAL  [MICRO-FIDUCIAL]  202.06,93.09 0 top
FD178  FIDUCIALUFIDUCIAL  [MICRO-FIDUCIAL]  215.39,101.09 0 top
FD179  FIDUCIALUFIDUCIAL  [MICRO-FIDUCIAL]  225.43,93.09 0 top
FD180  FIDUCIALUFIDUCIAL  [MICRO-FIDUCIAL]  238.76,101.09 0 top
FD181  FIDUCIALUFIDUCIAL  [MICRO-FIDUCIAL]  15.11,103.76 0 top
FD182  FIDUCIALUFIDUCIAL  [MICRO-FIDUCIAL]  28.45,111.76 0 top
FD183  FIDUCIALUFIDUCIAL  [MICRO-FIDUCIAL]  38.48,103.76 0 top
FD184  FIDUCIALUFIDUCIAL  [MICRO-FIDUCIAL]  51.82,111.76 0 top
FD185  FIDUCIALUFIDUCIAL  [MICRO-FIDUCIAL]  61.85,103.76 0 top
FD186  FIDUCIALUFIDUCIAL  [MICRO-FIDUCIAL]  75.18,111.76 0 top
FD187  FIDUCIALUFIDUCIAL  [MICRO-FIDUCIAL]  85.22,103.76 0 top
FD188  FIDUCIALUFIDUCIAL  [MICRO-FIDUCIAL]  98.55,111.76 0 top
FD189  FIDUCIALUFIDUCIAL  [MICRO-FIDUCIAL]  108.58,103.76 0 top
FD190  FIDUCIALUFIDUCIAL  [MICRO-FIDUCIAL]  121.92,111.76 0 top
FD191  FIDUCIALUFIDUCIAL  [MICRO-FIDUCIAL]  131.95,103.76 0 top
FD192  FIDUCIALUFIDUCIAL  [MICRO-FIDUCIAL]  145.29,111.76 0 top
FD193  FIDUCIALUFIDUCIAL  [MICRO-FIDUCIAL]  155.32,103.76 0 top
FD194  FIDUCIALUFIDUCIAL  [MICRO-FIDUCIAL]  168.66,111.76 0 top
FD195  FIDUCIALUFIDUCIAL  [MICRO-FIDUCIAL]  178.69,103.76 0 top
FD196  FIDUCIALUFIDUCIAL  [MICRO-FIDUCIAL]  192.02,111.76 0 top
FD197  FIDUCIALUFIDUCIAL  [MICRO-FIDUCIAL]  202.06,103.76 0 top
FD198  FIDUCIALUFIDUCIAL  [MICRO-FIDUCIAL]  215.39,111.76 0 top
FD199  FIDUCIALUFIDUCIAL  [MICRO-FIDUCIAL]  225.43,103.76 0 top
FD200  FIDUCIALUFIDUCIAL  [MICRO-FIDUCIAL]  238.76,111.76 0 top
H1  STAND-OFF  [STAND-OFF]  27.18,11.94 0 top
H2  STAND-OFF  [STAND-OFF]  50.55,11.94 0 top
H3  STAND-OFF  [STAND-OFF]  73.91,11.94 0 top
H4  STAND-OFF  [STAND-OFF]  97.28,11.94 0 top
H5  STAND-OFF  [STAND-OFF]  120.65,11.94 0 top
H6  STAND-OFF  [STAND-OFF]  144.02,11.94 0 top
H7  STAND-OFF  [STAND-OFF]  167.39,11.94 0 top
H8  STAND-OFF  [STAND-OFF]  190.75,11.94 0 top
H9  STAND-OFF  [STAND-OFF]  214.12,11.94 0 top
H10  STAND-OFF  [STAND-OFF]  237.49,11.94 0 top
H11  STAND-OFF  [STAND-OFF]  27.18,22.61 0 top
H12  STAND-OFF  [STAND-OFF]  50.55,22.61 0 top
H13  STAND-OFF  [STAND-OFF]  73.91,22.61 0 top
H14  STAND-OFF  [STAND-OFF]  97.28,22.61 0 top
H15  STAND-OFF  [STAND-OFF]  120.65,22.61 0 top
H16  STAND-OFF  [STAND-OFF]  144.02,22.61 0 top
H17  STAND-OFF  [STAND-OFF]  167.39,22.61 0 top
H18  STAND-OFF  [STAND-OFF]  190.75,22.61 0 top
H19  STAND-OFF  [STAND-OFF]  214.12,22.61 0 top
H20  STAND-OFF  [STAND-OFF]  237.49,22.61 0 top
H21  STAND-OFF  [STAND-OFF]  27.18,33.27 0 top
H22  STAND-OFF  [STAND-OFF]  50.55,33.27 0 top
H23  STAND-OFF  [STAND-OFF]  73.91,33.27 0 top
H24  STAND-OFF  [STAND-OFF]  97.28,33.27 0 top
H25  STAND-OFF  [STAND-OFF]  120.65,33.27 0 top
H26  STAND-OFF  [STAND-OFF]  144.02,33.27 0 top
H27  STAND-OFF  [STAND-OFF]  167.39,33.27 0 top
H28  STAND-OFF  [STAND-OFF]  190.75,33.27 0 top
H29  STAND-OFF  [STAND-OFF]  214.12,33.27 0 top
H30  STAND-OFF  [STAND-OFF]  237.49,33.27 0 top
H31  STAND-OFF  [STAND-OFF]  27.18,43.94 0 top
H32  STAND-OFF  [STAND-OFF]  50.55,43.94 0 top
H33  STAND-OFF  [STAND-OFF]  73.91,43.94 0 top
H34  STAND-OFF  [STAND-OFF]  97.28,43.94 0 top
H35  STAND-OFF  [STAND-OFF]  120.65,43.94 0 top
H36  STAND-OFF  [STAND-OFF]  144.02,43.94 0 top
H37  STAND-OFF  [STAND-OFF]  167.39,43.94 0 top
H38  STAND-OFF  [STAND-OFF]  190.75,43.94 0 top
H39  STAND-OFF  [STAND-OFF]  214.12,43.94 0 top
H40  STAND-OFF  [STAND-OFF]  237.49,43.94 0 top
H41  STAND-OFF  [STAND-OFF]  27.18,54.61 0 top
H42  STAND-OFF  [STAND-OFF]  50.55,54.61 0 top
H43  STAND-OFF  [STAND-OFF]  73.91,54.61 0 top
H44  STAND-OFF  [STAND-OFF]  97.28,54.61 0 top
H45  STAND-OFF  [STAND-OFF]  120.65,54.61 0 top
H46  STAND-OFF  [STAND-OFF]  144.02,54.61 0 top
H47  STAND-OFF  [STAND-OFF]  167.39,54.61 0 top
H48  STAND-OFF  [STAND-OFF]  190.75,54.61 0 top
H49  STAND-OFF  [STAND-OFF]  214.12,54.61 0 top
H50  STAND-OFF  [STAND-OFF]  237.49,54.61 0 top
H51  STAND-OFF  [STAND-OFF]  27.18,65.28 0 top
H52  STAND-OFF  [STAND-OFF]  50.55,65.28 0 top
H53  STAND-OFF  [STAND-OFF]  73.91,65.28 0 top
H54  STAND-OFF  [STAND-OFF]  97.28,65.28 0 top
H55  STAND-OFF  [STAND-OFF]  120.65,65.28 0 top
H56  STAND-OFF  [STAND-OFF]  144.02,65.28 0 top
H57  STAND-OFF  [STAND-OFF]  167.39,65.28 0 top
H58  STAND-OFF  [STAND-OFF]  190.75,65.28 0 top
H59  STAND-OFF  [STAND-OFF]  214.12,65.28 0 top
H60  STAND-OFF  [STAND-OFF]  237.49,65.28 0 top
H61  STAND-OFF  [STAND-OFF]  27.18,75.95 0 top
H62  STAND-OFF  [STAND-OFF]  50.55,75.95 0 top
H63  STAND-OFF  [STAND-OFF]  73.91,75.95 0 top
H64  STAND-OFF  [STAND-OFF]  97.28,75.95 0 top
H65  STAND-OFF  [STAND-OFF]  120.65,75.95 0 top
H66  STAND-OFF  [STAND-OFF]  144.02,75.95 0 top
H67  STAND-OFF  [STAND-OFF]  167.39,75.95 0 top
H68  STAND-OFF  [STAND-OFF]  190.75,75.95 0 top
H69  STAND-OFF  [STAND-OFF]  214.12,75.95 0 top
H70  STAND-OFF  [STAND-OFF]  237.49,75.95 0 top
H71  STAND-OFF  [STAND-OFF]  27.18,86.61 0 top
H72  STAND-OFF  [STAND-OFF]  50.55,86.61 0 top
H73  STAND-OFF  [STAND-OFF]  73.91,86.61 0 top
H74  STAND-OFF  [STAND-OFF]  97.28,86.61 0 top
H75  STAND-OFF  [STAND-OFF]  120.65,86.61 0 top
H76  STAND-OFF  [STAND-OFF]  144.02,86.61 0 top
H77  STAND-OFF  [STAND-OFF]  167.39,86.61 0 top
H78  STAND-OFF  [STAND-OFF]  190.75,86.61 0 top
H79  STAND-OFF  [STAND-OFF]  214.12,86.61 0 top
H80  STAND-OFF  [STAND-OFF]  237.49,86.61 0 top
H81  STAND-OFF  [STAND-OFF]  27.18,97.28 0 top
H82  STAND-OFF  [STAND-OFF]  50.55,97.28 0 top
H83  STAND-OFF  [STAND-OFF]  73.91,97.28 0 top
H84  STAND-OFF  [STAND-OFF]  97.28,97.28 0 top
H85  STAND-OFF  [STAND-OFF]  120.65,97.28 0 top
H86  STAND-OFF  [STAND-OFF]  144.02,97.28 0 top
H87  STAND-OFF  [STAND-OFF]  167.39,97.28 0 top
H88  STAND-OFF  [STAND-OFF]  190.75,97.28 0 top
H89  STAND-OFF  [STAND-OFF]  214.12,97.28 0 top
H90  STAND-OFF  [STAND-OFF]  237.49,97.28 0 top
H91  STAND-OFF  [STAND-OFF]  27.18,107.95 0 top
H92  STAND-OFF  [STAND-OFF]  50.55,107.95 0 top
H93  STAND-OFF  [STAND-OFF]  73.91,107.95 0 top
H94  STAND-OFF  [STAND-OFF]  97.28,107.95 0 top
H95  STAND-OFF  [STAND-OFF]  120.65,107.95 0 top
H96  STAND-OFF  [STAND-OFF]  144.02,107.95 0 top
H97  STAND-OFF  [STAND-OFF]  167.39,107.95 0 top
H98  STAND-OFF  [STAND-OFF]  190.75,107.95 0 top
H99  STAND-OFF  [STAND-OFF]  214.12,107.95 0 top
H100  STAND-OFF  [STAND-OFF]  237.49,107.95 0 top
J1  [1X04_NO_SILK_ALL_ROUND]  31.5,15.75 270 top
J2  [1X04_NO_SILK_ALL_ROUND]  8.13,15.75 270 top
J3  [1X04_NO_SILK_ALL_ROUND]  54.86,15.75 270 top
J4  [1X04_NO_SILK_ALL_ROUND]  78.23,15.75 270 top
J5  [1X04_NO_SILK_ALL_ROUND]  101.6,15.75 270 top
J6  [1X04_NO_SILK_ALL_ROUND]  124.97,15.75 270 top
J7  [1X04_NO_SILK_ALL_ROUND]  148.34,15.75 270 top
J8  [1X04_NO_SILK_ALL_ROUND]  171.7,15.75 270 top
J9  [1X04_NO_SILK_ALL_ROUND]  195.07,15.75 270 top
J10  [1X04_NO_SILK_ALL_ROUND]  218.44,15.75 270 top
J11  [1X04_NO_SILK_ALL_ROUND]  8.13,26.42 270 top
J12  [1X04_NO_SILK_ALL_ROUND]  31.5,26.42 270 top
J13  [1X04_NO_SILK_ALL_ROUND]  54.86,26.42 270 top
J14  [1X04_NO_SILK_ALL_ROUND]  78.23,26.42 270 top
J15  [1X04_NO_SILK_ALL_ROUND]  101.6,26.42 270 top
J16  [1X04_NO_SILK_ALL_ROUND]  124.97,26.42 270 top
J17  [1X04_NO_SILK_ALL_ROUND]  148.34,26.42 270 top
J18  [1X04_NO_SILK_ALL_ROUND]  171.7,26.42 270 top
J19  [1X04_NO_SILK_ALL_ROUND]  195.07,26.42 270 top
J20  [1X04_NO_SILK_ALL_ROUND]  218.44,26.42 270 top
J21  [1X04_NO_SILK_ALL_ROUND]  8.13,37.08 270 top
J22  [1X04_NO_SILK_ALL_ROUND]  31.5,37.08 270 top
J23  [1X04_NO_SILK_ALL_ROUND]  54.86,37.08 270 top
J24  [1X04_NO_SILK_ALL_ROUND]  78.23,37.08 270 top
J25  [1X04_NO_SILK_ALL_ROUND]  101.6,37.08 270 top
J26  [1X04_NO_SILK_ALL_ROUND]  124.97,37.08 270 top
J27  [1X04_NO_SILK_ALL_ROUND]  148.34,37.08 270 top
J28  [1X04_NO_SILK_ALL_ROUND]  171.7,37.08 270 top
J29  [1X04_NO_SILK_ALL_ROUND]  195.07,37.08 270 top
J30  [1X04_NO_SILK_ALL_ROUND]  218.44,37.08 270 top
J31  [1X04_NO_SILK_ALL_ROUND]  8.13,47.75 270 top
J32  [1X04_NO_SILK_ALL_ROUND]  31.5,47.75 270 top
J33  [1X04_NO_SILK_ALL_ROUND]  54.86,47.75 270 top
J34  [1X04_NO_SILK_ALL_ROUND]  78.23,47.75 270 top
J35  [1X04_NO_SILK_ALL_ROUND]  101.6,47.75 270 top
J36  [1X04_NO_SILK_ALL_ROUND]  124.97,47.75 270 top
J37  [1X04_NO_SILK_ALL_ROUND]  148.34,47.75 270 top
J38  [1X04_NO_SILK_ALL_ROUND]  171.7,47.75 270 top
J39  [1X04_NO_SILK_ALL_ROUND]  195.07,47.75 270 top
J40  [1X04_NO_SILK_ALL_ROUND]  218.44,47.75 270 top
J41  [1X04_NO_SILK_ALL_ROUND]  8.13,58.42 270 top
J42  [1X04_NO_SILK_ALL_ROUND]  31.5,58.42 270 top
J43  [1X04_NO_SILK_ALL_ROUND]  54.86,58.42 270 top
J44  [1X04_NO_SILK_ALL_ROUND]  78.23,58.42 270 top
J45  [1X04_NO_SILK_ALL_ROUND]  101.6,58.42 270 top
J46  [1X04_NO_SILK_ALL_ROUND]  124.97,58.42 270 top
J47  [1X04_NO_SILK_ALL_ROUND]  148.34,58.42 270 top
J48  [1X04_NO_SILK_ALL_ROUND]  171.7,58.42 270 top
J49  [1X04_NO_SILK_ALL_ROUND]  195.07,58.42 270 top
J50  [1X04_NO_SILK_ALL_ROUND]  218.44,58.42 270 top
J51  [1X04_NO_SILK_ALL_ROUND]  8.13,69.09 270 top
J52  [1X04_NO_SILK_ALL_ROUND]  31.5,69.09 270 top
J53  [1X04_NO_SILK_ALL_ROUND]  54.86,69.09 270 top
J54  [1X04_NO_SILK_ALL_ROUND]  78.23,69.09 270 top
J55  [1X04_NO_SILK_ALL_ROUND]  101.6,69.09 270 top
J56  [1X04_NO_SILK_ALL_ROUND]  124.97,69.09 270 top
J57  [1X04_NO_SILK_ALL_ROUND]  148.34,69.09 270 top
J58  [1X04_NO_SILK_ALL_ROUND]  171.7,69.09 270 top
J59  [1X04_NO_SILK_ALL_ROUND]  195.07,69.09 270 top
J60  [1X04_NO_SILK_ALL_ROUND]  218.44,69.09 270 top
J61  [1X04_NO_SILK_ALL_ROUND]  8.13,79.76 270 top
J62  [1X04_NO_SILK_ALL_ROUND]  31.5,79.76 270 top
J63  [1X04_NO_SILK_ALL_ROUND]  54.86,79.76 270 top
J64  [1X04_NO_SILK_ALL_ROUND]  78.23,79.76 270 top
J65  [1X04_NO_SILK_ALL_ROUND]  101.6,79.76 270 top
J66  [1X04_NO_SILK_ALL_ROUND]  124.97,79.76 270 top
J67  [1X04_NO_SILK_ALL_ROUND]  148.34,79.76 270 top
J68  [1X04_NO_SILK_ALL_ROUND]  171.7,79.76 270 top
J69  [1X04_NO_SILK_ALL_ROUND]  195.07,79.76 270 top
J70  [1X04_NO_SILK_ALL_ROUND]  218.44,79.76 270 top
J71  [1X04_NO_SILK_ALL_ROUND]  8.13,90.42 270 top
J72  [1X04_NO_SILK_ALL_ROUND]  31.5,90.42 270 top
J73  [1X04_NO_SILK_ALL_ROUND]  54.86,90.42 270 top
J74  [1X04_NO_SILK_ALL_ROUND]  78.23,90.42 270 top
J75  [1X04_NO_SILK_ALL_ROUND]  101.6,90.42 270 top
J76  [1X04_NO_SILK_ALL_ROUND]  124.97,90.42 270 top
J77  [1X04_NO_SILK_ALL_ROUND]  148.34,90.42 270 top
J78  [1X04_NO_SILK_ALL_ROUND]  171.7,90.42 270 top
J79  [1X04_NO_SILK_ALL_ROUND]  195.07,90.42 270 top
J80  [1X04_NO_SILK_ALL_ROUND]  218.44,90.42 270 top
J81  [1X04_NO_SILK_ALL_ROUND]  8.13,101.09 270 top
J82  [1X04_NO_SILK_ALL_ROUND]  31.5,101.09 270 top
J83  [1X04_NO_SILK_ALL_ROUND]  54.86,101.09 270 top
J84  [1X04_NO_SILK_ALL_ROUND]  78.23,101.09 270 top
J85  [1X04_NO_SILK_ALL_ROUND]  101.6,101.09 270 top
J86  [1X04_NO_SILK_ALL_ROUND]  124.97,101.09 270 top
J87  [1X04_NO_SILK_ALL_ROUND]  148.34,101.09 270 top
J88  [1X04_NO_SILK_ALL_ROUND]  171.7,101.09 270 top
J89  [1X04_NO_SILK_ALL_ROUND]  195.07,101.09 270 top
J90  [1X04_NO_SILK_ALL_ROUND]  218.44,101.09 270 top
J91  [1X04_NO_SILK_ALL_ROUND]  8.13,111.76 270 top
J92  [1X04_NO_SILK_ALL_ROUND]  31.5,111.76 270 top
J93  [1X04_NO_SILK_ALL_ROUND]  54.86,111.76 270 top
J94  [1X04_NO_SILK_ALL_ROUND]  78.23,111.76 270 top
J95  [1X04_NO_SILK_ALL_ROUND]  101.6,111.76 270 top
J96  [1X04_NO_SILK_ALL_ROUND]  124.97,111.76 270 top
J97  [1X04_NO_SILK_ALL_ROUND]  148.34,111.76 270 top
J98  [1X04_NO_SILK_ALL_ROUND]  171.7,111.76 270 top
J99  [1X04_NO_SILK_ALL_ROUND]  195.07,111.76 270 top
J100  [1X04_NO_SILK_ALL_ROUND]  218.44,111.76 270 top
JP1  [PAD-JUMPER-3-3OF3_NC_BY_TRACE_YES_SILK_FULL_BOX]  16.38,14.99 0 bottom
JP2  [PAD-JUMPER-3-2OF3_NC_BY_TRACE_YES_SILK_FULL_BOX]  23.24,9.27 90 bottom
JP3  [PAD-JUMPER-3-2OF3_NC_BY_TRACE_YES_SILK_FULL_BOX]  23.24,13.26 90 bottom
JP4  [PAD-JUMPER-3-3OF3_NC_BY_TRACE_YES_SILK_FULL_BOX]  39.75,14.99 0 bottom
JP5  [PAD-JUMPER-3-2OF3_NC_BY_TRACE_YES_SILK_FULL_BOX]  46.61,9.27 90 bottom
JP6  [PAD-JUMPER-3-2OF3_NC_BY_TRACE_YES_SILK_FULL_BOX]  46.61,13.26 90 bottom
JP7  [PAD-JUMPER-3-3OF3_NC_BY_TRACE_YES_SILK_FULL_BOX]  63.12,14.99 0 bottom
JP8  [PAD-JUMPER-3-2OF3_NC_BY_TRACE_YES_SILK_FULL_BOX]  69.98,9.27 90 bottom
JP9  [PAD-JUMPER-3-2OF3_NC_BY_TRACE_YES_SILK_FULL_BOX]  69.98,13.26 90 bottom
JP10  [PAD-JUMPER-3-3OF3_NC_BY_TRACE_YES_SILK_FULL_BOX]  86.49,14.99 0 bottom
JP11  [PAD-JUMPER-3-2OF3_NC_BY_TRACE_YES_SILK_FULL_BOX]  93.34,9.27 90 bottom
JP12  [PAD-JUMPER-3-2OF3_NC_BY_TRACE_YES_SILK_FULL_BOX]  93.34,13.26 90 bottom
JP13  [PAD-JUMPER-3-3OF3_NC_BY_TRACE_YES_SILK_FULL_BOX]  109.86,14.99 0 bottom
JP14  [PAD-JUMPER-3-2OF3_NC_BY_TRACE_YES_SILK_FULL_BOX]  116.71,9.27 90 bottom
JP15  [PAD-JUMPER-3-2OF3_NC_BY_TRACE_YES_SILK_FULL_BOX]  116.71,13.26 90 bottom
JP16  [PAD-JUMPER-3-3OF3_NC_BY_TRACE_YES_SILK_FULL_BOX]  133.22,14.99 0 bottom
JP17  [PAD-JUMPER-3-2OF3_NC_BY_TRACE_YES_SILK_FULL_BOX]  140.08,9.27 90 bottom
JP18  [PAD-JUMPER-3-2OF3_NC_BY_TRACE_YES_SILK_FULL_BOX]  140.08,13.26 90 bottom
JP19  [PAD-JUMPER-3-3OF3_NC_BY_TRACE_YES_SILK_FULL_BOX]  156.59,14.99 0 bottom
JP20  [PAD-JUMPER-3-2OF3_NC_BY_TRACE_YES_SILK_FULL_BOX]  163.45,9.27 90 bottom
JP21  [PAD-JUMPER-3-2OF3_NC_BY_TRACE_YES_SILK_FULL_BOX]  163.45,13.26 90 bottom
JP22  [PAD-JUMPER-3-3OF3_NC_BY_TRACE_YES_SILK_FULL_BOX]  179.96,14.99 0 bottom
JP23  [PAD-JUMPER-3-2OF3_NC_BY_TRACE_YES_SILK_FULL_BOX]  186.82,9.27 90 bottom
JP24  [PAD-JUMPER-3-2OF3_NC_BY_TRACE_YES_SILK_FULL_BOX]  186.82,13.26 90 bottom
JP25  [PAD-JUMPER-3-3OF3_NC_BY_TRACE_YES_SILK_FULL_BOX]  203.33,14.99 0 bottom
JP26  [PAD-JUMPER-3-2OF3_NC_BY_TRACE_YES_SILK_FULL_BOX]  210.19,9.27 90 bottom
JP27  [PAD-JUMPER-3-2OF3_NC_BY_TRACE_YES_SILK_FULL_BOX]  210.19,13.26 90 bottom
JP28  [PAD-JUMPER-3-3OF3_NC_BY_TRACE_YES_SILK_FULL_BOX]  226.69,14.99 0 bottom
JP29  [PAD-JUMPER-3-2OF3_NC_BY_TRACE_YES_SILK_FULL_BOX]  233.55,9.27 90 bottom
JP30  [PAD-JUMPER-3-2OF3_NC_BY_TRACE_YES_SILK_FULL_BOX]  233.55,13.26 90 bottom
JP31  [PAD-JUMPER-3-3OF3_NC_BY_TRACE_YES_SILK_FULL_BOX]  16.38,25.65 0 bottom
JP32  [PAD-JUMPER-3-2OF3_NC_BY_TRACE_YES_SILK_FULL_BOX]  23.24,19.94 90 bottom
JP33  [PAD-JUMPER-3-2OF3_NC_BY_TRACE_YES_SILK_FULL_BOX]  23.24,23.93 90 bottom
JP34  [PAD-JUMPER-3-3OF3_NC_BY_TRACE_YES_SILK_FULL_BOX]  39.75,25.65 0 bottom
JP35  [PAD-JUMPER-3-2OF3_NC_BY_TRACE_YES_SILK_FULL_BOX]  46.61,19.94 90 bottom
JP36  [PAD-JUMPER-3-2OF3_NC_BY_TRACE_YES_SILK_FULL_BOX]  46.61,23.93 90 bottom
JP37  [PAD-JUMPER-3-3OF3_NC_BY_TRACE_YES_SILK_FULL_BOX]  63.12,25.65 0 bottom
JP38  [PAD-JUMPER-3-2OF3_NC_BY_TRACE_YES_SILK_FULL_BOX]  69.98,19.94 90 bottom
JP39  [PAD-JUMPER-3-2OF3_NC_BY_TRACE_YES_SILK_FULL_BOX]  69.98,23.93 90 bottom
JP40  [PAD-JUMPER-3-3OF3_NC_BY_TRACE_YES_SILK_FULL_BOX]  86.49,25.65 0 bottom
JP41  [PAD-JUMPER-3-2OF3_NC_BY_TRACE_YES_SILK_FULL_BOX]  93.34,19.94 90 bottom